# EAGLE board ApolloBlind(v0.2) (EAGLE 7.6.0)

Size 56.82 x 53.33 mm. Coordinates in mm from the lower left corner, seen from the top.
Outline: 0,0 56.82,0 56.82,53.33 0,53.33 0,0
Copper layers (1*16): Top 0.035mm / dielectric 1.5mm / Bottom 0.035mm
Design rules "default": minimum track width 10mil, minimum drill 24mil, track to track 8mil, track to pad 8mil, pad to pad 8mil, via to via 8mil, smd to smd 8mil, copper to edge 40mil, drill to drill 8mil, minimum pad ring 10mil, minimum via ring 8mil, stop-mask expansion 4mil, vias tented up to drill 0mil, thermal gap 10mil

## Footprints (pad centres in the part's own frame; a part is rotated, then mirrored left to right if it is on the bottom)
CR2032H = drill 1.118 pad 2.54 octagon: + 5.08,10.795; +@1 -5.08,10.795; - 0,-6.985
2P-2.54-65/35MIL = drill 0.889 pad 1.651 square: 1 0,1.27 | drill 0.889 pad 1.651: 2 0,-1.27
1X3P-2.54-2.54-11.6-3.0-BLACK-MALE = drill 0.889 pad 1.651 square: 1 0,2.54 | drill 0.889 pad 1.651: 2 0,0; 3 0,-2.54
0207/10 = drill 0.813 octagon: 1 -5.08,0; 2 5.08,0
TO92 = drill 0.813 octagon: 1 1.27,0; 2 0,1.905; 3 -1.27,0
DIL08 = drill 0.813 pad 1.27: 1 -3.81,-3.81; 2 -1.27,-3.81; 3 1.27,-3.81; 4 3.81,-3.81; 5 3.81,3.81; 6 1.27,3.81; 7 -1.27,3.81; 8 -3.81,3.81

## Placement (x,y rotation side)
BAT1  [CR2032H]  5,10.08 0 top
M1  [2P-2.54-65/35MIL]  5,22.78 0 top
PIR1  [1X3P-2.54-2.54-11.6-3.0-BLACK-MALE]  5,35.48 0 top
R1  1k‎Ω  [0207/10]  5,73.58 0 top  (outside the outline)
T1  [TO92]  5,60.88 0 top  (outside the outline)
U1  [DIL08]  5,48.18 0 top

## Library data of the parts
BAT1 M1 PIR1 R1 T1 U1 = AUTODESK_CIRCUITS_BREADBOARD

## Nets
N$1: BAT1.+ BAT1.+@1 M1.2 PIR1.2 U1.8
N$2: BAT1.- PIR1.1 T1.1 U1.4
N$3: PIR1.3 U1.3
N$4: M1.1 T1.2
N$5: R1.1 U1.7
N$6: R1.2 T1.3

## Tracks (layer width: path | path; a pad name or v marks a point on that pad's centre or on a via)
N$1  (4 unrouted)
N$2  (3 unrouted)
N$3  (1 unrouted)
N$4  (1 unrouted)
N$5  (1 unrouted)
N$6  (1 unrouted)